# Altium PCB Boost_PCB.PcbDoc
Units mm, origin at the board's own origin, x right, y up, seen from the top; angles counter-clockwise.
Board outline 63.5 x 49.53 mm, 2 copper layers (Top Layer, Bottom Layer); 37 components, 20 nets, 129 pads, 149 vias.
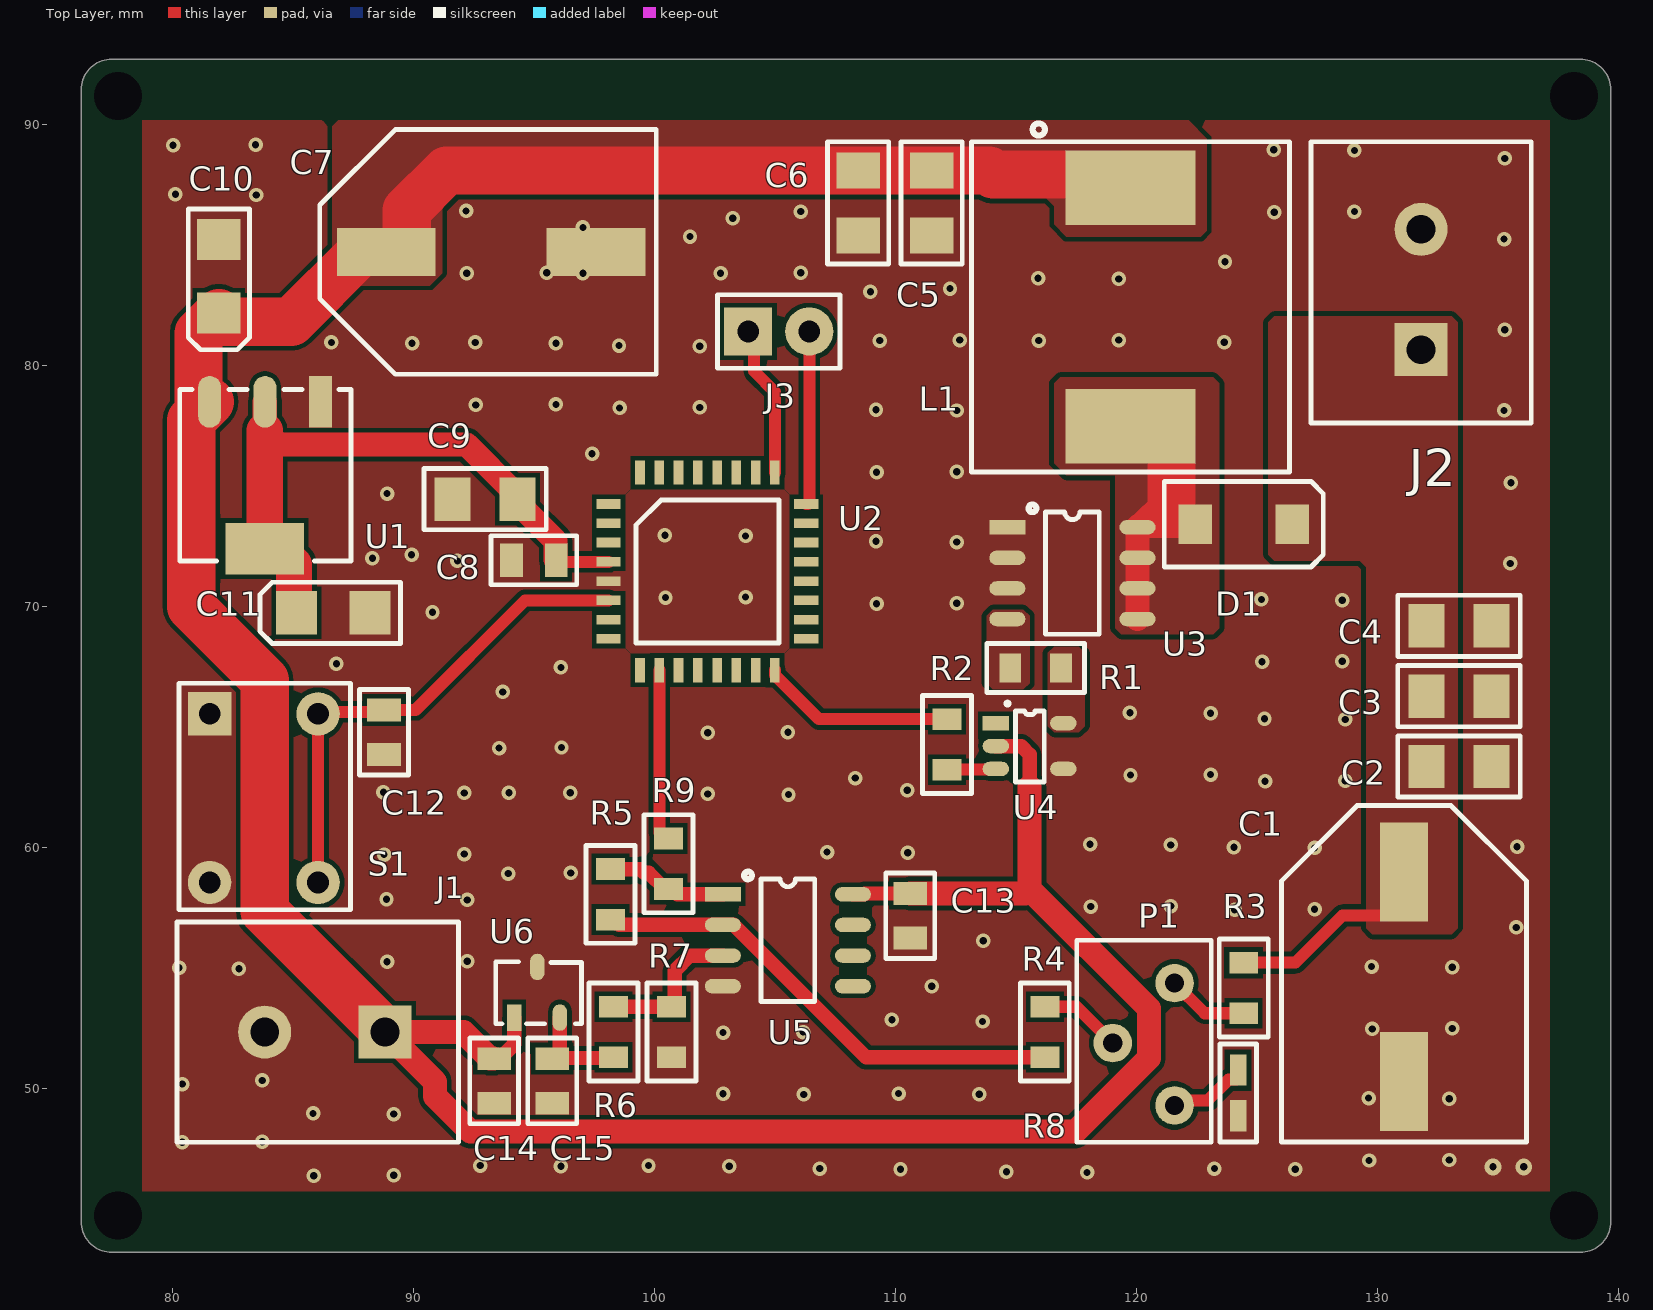
[diagram p0: Top Layer view]
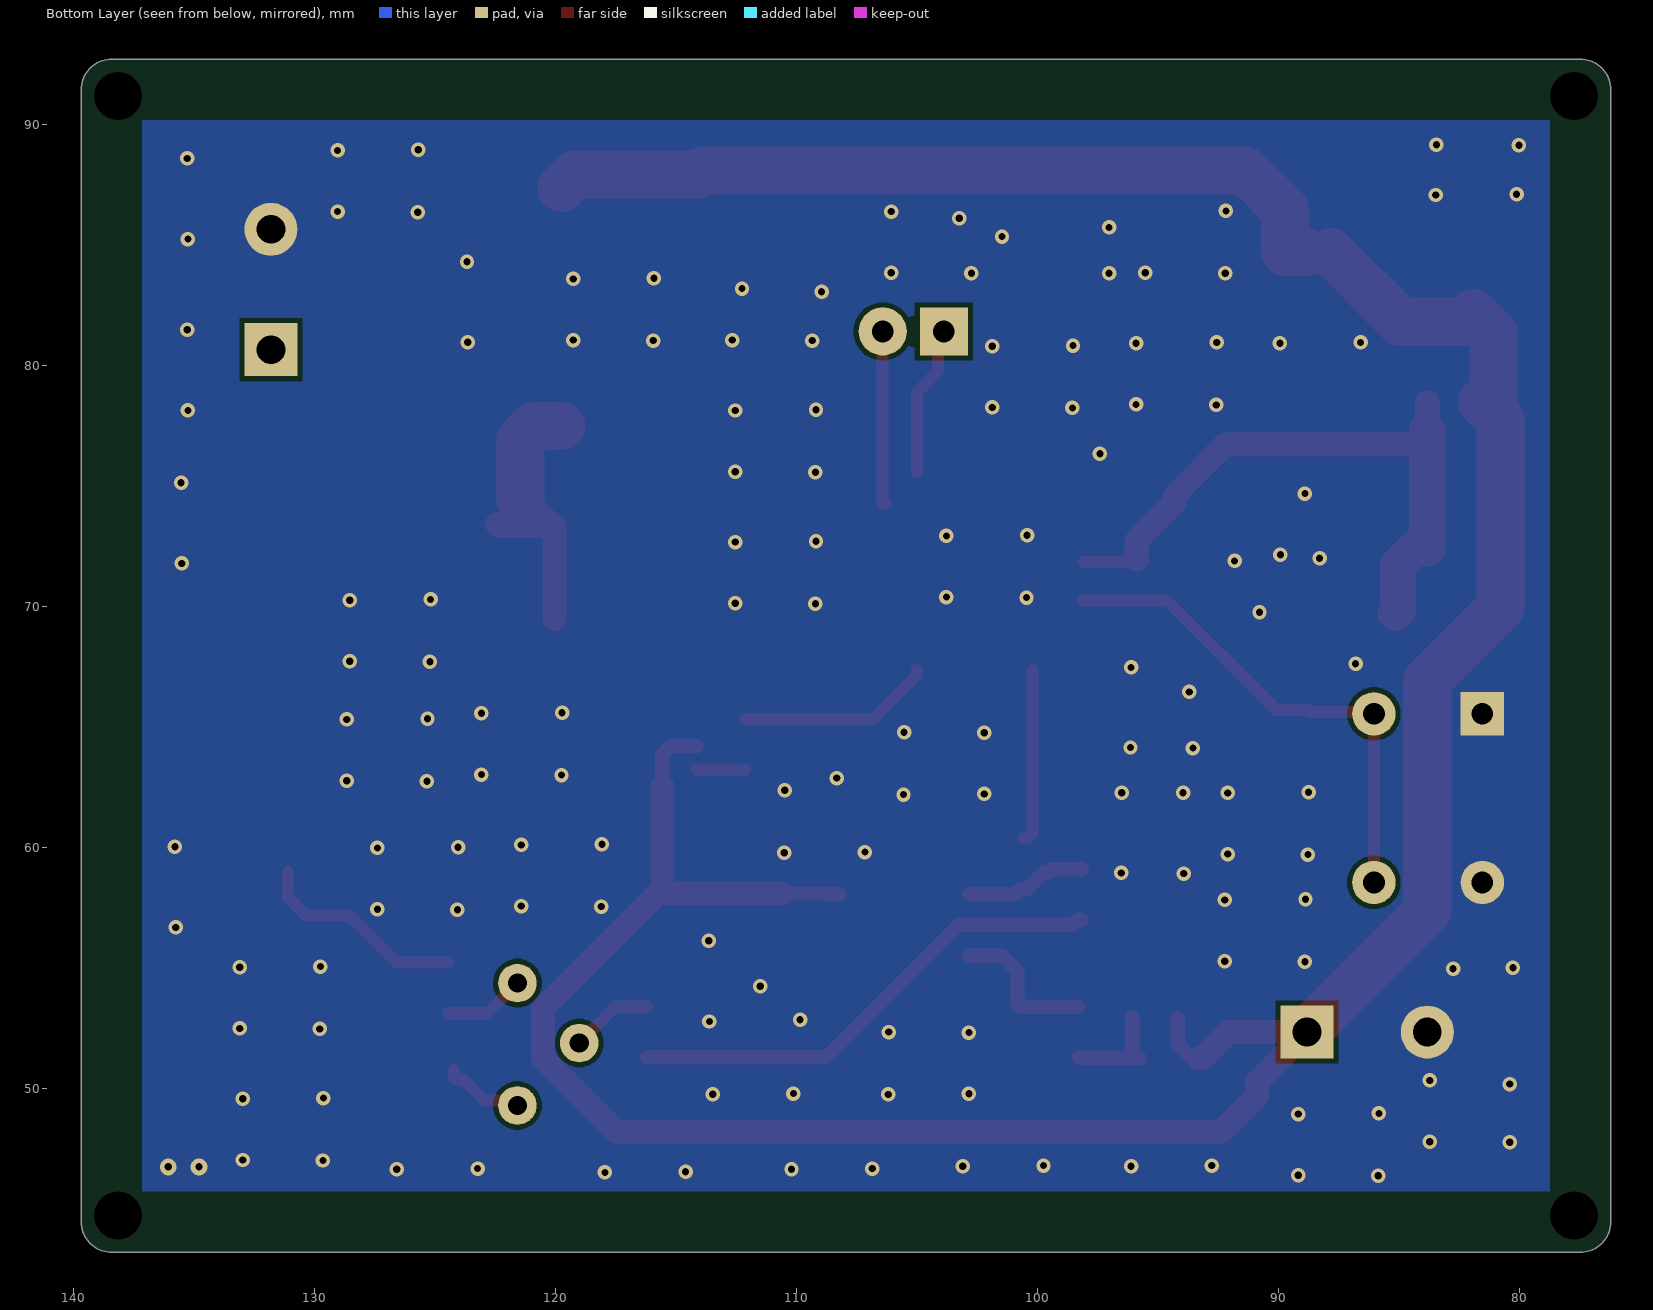
[diagram p1: Bottom Layer view, seen from below]
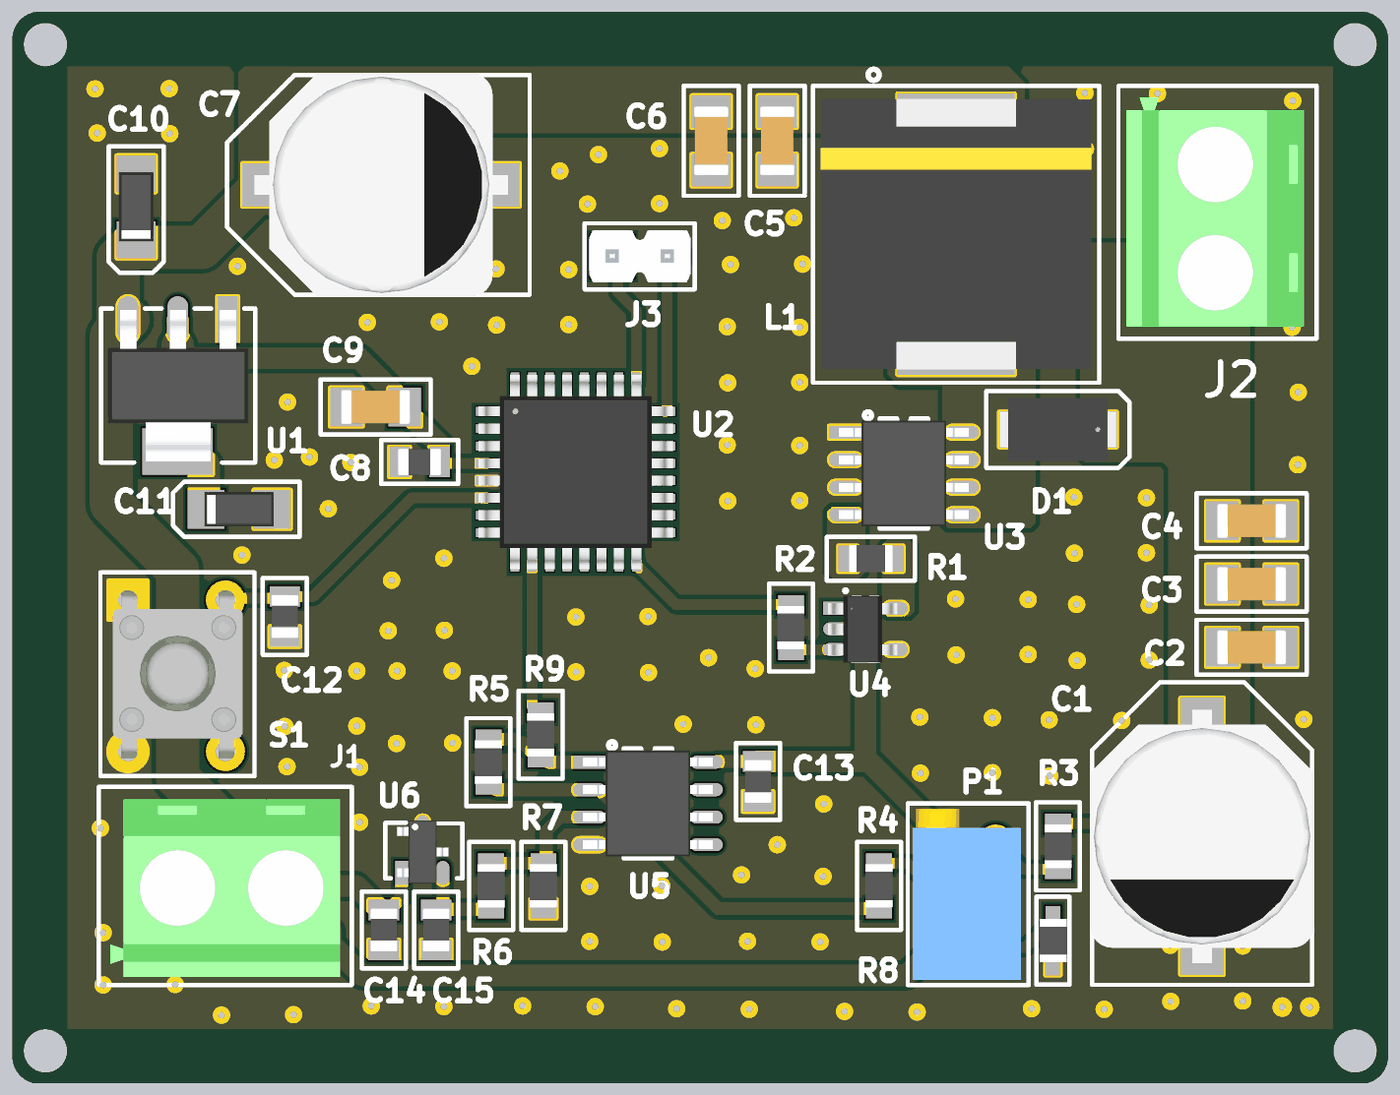
[diagram p2: 3D render of the assembled board from above, using the file's embedded part models]

## Layer stack, top to bottom
Top Solder: solder mask 0.0102, Solder Resist, Dk 3.5
Top Layer: signal copper 0.0356
Dielectric 1: dielectric 0.32, FR-4, Dk 4.8
Bottom Layer: signal copper 0.0356
Bottom Solder: solder mask 0.0102, Solder Resist, Dk 3.5

## Board outline
76.2,44.45 ccw(c77.47,44.45) 77.47,43.18 138.43,43.18 ccw(c138.43,44.45) 139.7,44.45 139.7,91.44 ccw(c138.43,91.44) 138.43,92.71 77.47,92.71 ccw(c77.47,91.44) 76.2,91.44

## Design rules (kind name [scope] priority, off if disabled: settings)
Clearance [All] p1: gap=0.2 ignorepadtopadclearanceinfootprint=FALSE
HoleSize [All] p1: absolutevalues=TRUE maxlimit=3.6 minlimit=0.025 maxpercent=80.000 minpercent=20.000
PlaneConnect [All] p1: planeconnectstyle=Direct reliefexpansion=0.508 reliefentries=4 reliefconductorwidth=0.254 reliefairgap=0.254
PolygonConnect [All] p1: connectstyle=Direct reliefconductorwidth=0.254 reliefentries=4 polygonreliefangle="90 Angle" airgapwidth=0.254
RoutingVias [All] p1: holewidth=0.3 width=0.6 viastyle="Through Hole" minholewidth=0.3 minwidth=0.6 maxholewidth=0.5 maxwidth=0.8
SilkToSolderMaskClearance [IsPad] p1: minsilkscreentomaskgap=0.1 clearancetoexposedcopper=TRUE
SolderMaskExpansion [All] p1: expansion=0.102 istentingtop=FALSE
SupplyNets "Schematic Supply Nets_2" [InNet('3V3')] p1: voltage=0.000
SupplyNets "Schematic Supply Nets_1" [InNet('GND')] p2: voltage=0.000
SupplyNets "Schematic Supply Nets" [InNet('+5')] p3: voltage=0.000
Width [All] p1: maxlimit=2 minlimit=0.3 preferedwidth=0.5 minimp=50.000000 maximp=50.000000 favimp=50.000000
27 further rules are at their usual default settings.

## Classes and differential pairs
component class Boost_Schem: C1 C2 C3 C4 C5 C6 C8 C9 C10 C11 C12 C13 C14 C15 D1 J3 L1 P1 R1 R2 R3 R4 R5 R6 R7 R8 R9 S1 U1 U2 U3 U4 U5 U6

## Components (designator, comment, footprint, x,y, rotation, side; value= is the part's Value field where it differs from the comment)
C1 "100u" CAP_100UF_ALUM 131.115,54.617 r90 top value=100µF
C2 "10u" "CAP_10UF_1206_CER - DUPLICATE" 133.401,63.348 r0 top value=10µF
C3 "10u" "CAP_10UF_1206_CER - DUPLICATE" 133.401,66.269 r0 top value=10µF
C4 "10u" "CAP_10UF_1206_CER - DUPLICATE" 133.401,69.19 r0 top value=10µF
C5 "10u" "CAP_10UF_1206_CER - DUPLICATE" 111.506,86.741 r270 top value=10µF
C6 "10u" "CAP_10UF_1206_CER - DUPLICATE" 108.458,86.741 r270 top value=10µF
C7 "100u" CAP_100UF_ALUM 93.218,84.709 r180 top value=100µF
C8 "100n" CAP_100N_0805_CER 94.996,71.907 r0 top
C9 "10u" "CAP_10UF_1206_CER - DUPLICATE" 92.964,74.447 r180 top value=10µF
C10 "10U" CAP_10U_1206_TANTAL 81.915,83.693 r270 top
C11 "10U" CAP_10U_1206_TANTAL 86.665,69.723 r180 top
C12 "100n" CAP_100N_0805_CER 88.773,64.77 r90 top
C13 "1U" CAP_1U_0805_CER 110.617,57.15 r90 top
C14 "100n" CAP_100N_0805_CER 93.345,50.292 r90 top
C15 "1U" CAP_1U_0805_CER 95.758,50.292 r90 top
D1 "SCHOTTKY_2A_60V" SCHOTKY 124.46,73.406 r0 top
J1 "LISTWA ZACISKOWA DO DRUKU" ZACISK 88.82,52.324 r180 top
J2 "LISTWA ZACISKOWA DO DRUKU" ZACISK 131.826,80.649 r90 top
J3 "ZŁĄCZE KOŁOWE" SWD 103.886,81.407 r90 top
L1 "33u" CEWKA 119.761,82.426 r270 top value=32.01µH
P1 "2K" POTENCJOMETR 119.05,54.356 r0 top
R1 "10" RES_10_0805 115.824,67.437 r180 top
R2 "10" RES_10_0805 112.141,64.262 r270 top
R3 "4.3K" RES_4K3_0805 124.46,54.153 r90 top value=4.3kΩ
R4 "100K" RES_100K_0805 116.205,52.324 r90 top
R5 "100K" RES_100K_0805 98.171,58.039 r270 top
R6 "100K" RES_100K_0805 98.298,52.324 r90 top
R7 "100K" RES_100K_0805 100.711,52.324 r90 top
R8 "51" REZ_51_OHM_0805 124.231,49.794 r90 top
R9 "RES_1K_0805" RES_1K_0805 100.584,59.309 r90 top
S1 "Tact Switch" SWITCH 81.534,65.532 r0 top
U1 "LM1117MPX-3.3" LDO 86.134,78.486 r270 top
U2 "STM32G030K8T6" QUAD32 102.199,71.444 r0 top
U3 "IRL6342TRPBF" TRANZYSTOR 117.348,71.374 r0 top
U4 "MCP1416T-E/OT" DRIVER 114.173,65.146 r0 top
U5 "MCP6022" WZMACNIACZ 105.537,56.134 r0 top
U6 "REF3033AIDBZR" REFF 95.123,53.975 r90 top

## Footprints (in the part's own frame and the unit in brackets; to place one, negate y for a bottom-side part, rotate by r counter-clockwise, add the part's x,y. Pads: shape width x height; smd on the part's side, far side on the other; paste and mask are expansions set on the pad)
CAP_1U_0805_CER [mm]
  rect 0.95x1.4 smd paste+0: 1(-0.925,0) 2(0.925,0)
  silkscreen extent -1.78,-1.02 1.78,1.02, body extent -1,-0.63 1,0.63, height 0.71
CAP_10U_1206_TANTAL [mm]
  rect 1.7x1.8 smd paste+0: 1(-1.525,0) 2(1.525,0)
  silkscreen extent -2.79,-1.27 3.05,1.27, body extent -1.6,-0.8 1.6,0.8, height 1.81
"CAP_10UF_1206_CER - DUPLICATE" [mm]
  rect 1.5x1.8 smd: 1(-1.35,0) 2(1.35,0)
  silkscreen extent -2.54,-1.27 2.54,1.27, body extent -1.6,-0.8 1.6,0.8, height 1.81
CAP_100N_0805_CER [mm]
  rect 0.95x1.4 smd paste+0: 1(-0.925,0) 2(0.925,0)
  silkscreen extent -1.78,-1.02 1.78,1.02, body extent -1,-0.63 1,0.63, height 0.71
CAP_100UF_ALUM [mm]
  rect 4.1x2 smd paste+0: 1(-4.35,0) 2(4.35,0)
  silkscreen extent -6.86,-5.08 7.11,5.08, body extent -5.85,-5.15 5.85,5.15, height 10.21
CEWKA [mm]
  rect 3.1x5.4 smd: 1(-4.95,0) 2(4.95,0)
  silkscreen extent -7.62,-6.6 6.86,6.6, body extent -6.25,-6.25 6.25,6.25, height 8
DRIVER [mm]
  rect 1.1x0.6 smd paste+0 mask+0.05: 1(0,0)
  oval 1.1x0.6 smd paste+0 mask+0.04: 2(0,-0.95)
  oval 1.1x0.6 smd paste+0 mask+0.05: 3(0,-1.9)
  oval 1.1x0.6 smd paste+0: 4(2.8,-1.9) 5(2.8,0)
  silkscreen extent 0.45,-2.44 2.01,0.85, body extent -0.33,-2.51 2.87,0.58, height 1.45
LDO [mm]
  rect 2.15x0.95 smd paste+0: 1(0,0)
  oval 2.15x0.95 smd paste+0: 2(0,-2.3) 3(0,-4.6)
  rect 2.15x3.25 smd paste+0: 4(6.096,-2.311)
  silkscreen extent -0.51,-5.84 6.6,1.27, body extent -0.45,-5.54 6.55,0.96, height 1.71
POTENCJOMETR [mm]
  round 1.6 hole 0.8: 1(2.54,0) 2(-0.025,-2.489) 3(2.54,-5.08)
  silkscreen extent -1.52,-6.6 4.06,1.78, body extent -1.3,-6.36 3.71,1.54, height 6.76
QUAD32 [mm]
  rect 1x0.4 smd paste+0 mask+0.07: 1(-4.1,2.8) 2(-4.1,2)
  rect 1x0.4 smd mask+0.07: 3(-4.1,1.2) 4(-4.1,0.4) 5(-4.1,-0.4) 6(-4.1,-1.2) 7(-4.1,-2) 8(-4.1,-2.8) 17(4.1,-2.8) 18(4.1,-2) 19(4.1,-1.2) 20(4.1,-0.4) 21(4.1,0.4) 22(4.1,1.2) 23(4.1,2) 24(4.1,2.8)
  rect 0.4x1 smd mask+0.07: 9(-2.8,-4.1) 10(-2,-4.1) 11(-1.2,-4.1) 12(-0.4,-4.1) 13(0.4,-4.1) 14(1.2,-4.1) 15(2,-4.1) 16(2.8,-4.1) 25(2.8,4.1) 26(2,4.1) 27(1.2,4.1) 28(0.4,4.1) 29(-0.4,4.1) 30(-1.2,4.1) 31(-2,4.1) 32(-2.8,4.1)
  silkscreen extent -2.97,-2.97 2.97,2.97, body extent -4.5,-4.5 4.5,4.5, height 1.6
REFF [mm]
  rect 1.1x0.6 smd paste+0: 1(-1.05,0.95)
  oval 1.1x0.6 smd paste+0: 2(-1.05,-0.95)
  oval 1.1x0.6 smd: 3(1.05,-0.015)
  silkscreen extent -1.3,-1.84 1.27,1.71, body extent -1.27,-1.48 1.1,1.44, height 1.03
RES_1K_0805 [mm]
  rect 0.9x1.2 smd paste+0 mask+0.102: 1(-1.05,0) 2(1.05,0)
  silkscreen extent -2.03,-1.02 2.03,1.02, body extent -1,-0.63 1,0.63, height 0.61
RES_4K3_0805 [mm]
  rect 0.9x1.2 smd paste+0 mask+0.102: 1(-1.05,0) 2(1.05,0)
  silkscreen extent -2.03,-1.02 2.03,1.02, body extent -1,-0.63 1,0.63, height 0.61
RES_10_0805 [mm]
  rect 0.9x1.2 smd paste+0 mask+0.102: 1(-1.05,0) 2(1.05,0)
  silkscreen extent -2.03,-1.02 2.03,1.02, body extent -1,-0.63 1,0.63, height 0.61
RES_100K_0805 [mm]
  rect 0.9x1.2 smd paste+0 mask+0.102: 1(-1.05,0) 2(1.05,0)
  silkscreen extent -2.03,-1.02 2.03,1.02, body extent -1,-0.63 1,0.63, height 0.61
REZ_51_OHM_0805 [mm]
  rect 1.3x0.7 smd: 1(-0.95,0) 2(0.95,0)
  silkscreen extent -2.03,-0.76 2.03,0.76, body extent -1,-0.63 1,0.63, height 0.61
SCHOTKY [mm]
  rect 1.4x1.64 smd paste+0 mask+0.102: 1(-2.015,0) 2(2.015,0)
  silkscreen extent -3.3,-1.78 3.3,1.78, body extent -2.68,-1.45 2.68,1.45, height 2.64
SWD [mm]
  rect 2x2 hole 0.9: 1(0,0)
  round 2 hole 0.9: 2(0,-2.54)
  silkscreen extent -1.52,-3.81 1.52,1.27, body extent -1.19,-3.61 1.22,1.07, height 8.19
SWITCH [mm]
  round 1.8 hole 0.9: 1(0,-7) 2(4.5,-7) 2(4.5,0)
  rect 1.8x1.8 hole 0.9: 1(0,0)
  silkscreen extent -1.27,-8.13 5.84,1.27, body extent -0.69,-7.3 5.3,0.5, height 13.01
TRANZYSTOR [mm]
  rect 1.5x0.6 smd paste+0: 1(-2.7,1.905)
  oval 1.5x0.6 smd paste+0: 2(-2.7,0.635) 3(-2.7,-0.635) 4(-2.7,-1.905) 5(2.7,-1.905) 6(2.7,-0.635) 7(2.7,0.635) 8(2.7,1.905)
  silkscreen extent -1.82,-2.54 1.12,2.85, body extent -3,-2.45 3,2.45, height 1.75
WZMACNIACZ [mm]
  rect 1.5x0.6 smd paste+0: 1(-2.7,1.905)
  oval 1.5x0.6 smd paste+0: 2(-2.7,0.635) 3(-2.7,-0.635) 4(-2.7,-1.905) 5(2.7,-1.905) 6(2.7,-0.635) 7(2.7,0.635) 8(2.7,1.905)
  silkscreen extent -1.82,-2.54 1.12,2.85, body extent -3,-2.45 3,2.45, height 1.75
ZACISK [mm]
  rect 2.2x2.2 hole 1.2: 1(0,0)
  round 2.2 hole 1.2: 2(5,0)
  silkscreen extent -3.05,-4.57 8.64,4.57, body extent -2.5,-4 8.1,4.2, height 10.01

## Part data
C1 C7: library part CAP_100UF_63V_ALUM, "SMD Aluminum Electrolytic Capacitor SMD, D10xL10.2mm 100μF ±20% 63V 2000Hrs@105℃ 400mA 350mΩ", Case/Package=Radial, Dielectric Material=Aluminium, ESR (Equivalent Series Resistance)=350mΩ, Leakage Current=63µA, Manufacturer=Panasonic, Manufacturer Lifecycle Status=ACTIVE, Manufacturer Part Number=EEEFK1J101P, Max Operating Temperature=105°C, Min Operating Temperature=-55°C, Ripple Current=400mA, Supplier Part Number=7083623P, Tolerance=20%, Voltage=63V, Category="Aluminum Electrolytic Capacitors", ComponentLink1Description=https://datasheet.octopart.com:443/EEEFK1J101P-Panasonic-datasheet-62287436.pdf?src-supplier=Farnell, ComponentLink1URL=https://datasheet.octopart.com:443/EEEFK1J101P-Panasonic-datasheet-62287436.pdf?src-supplier=Farnell, ComponentLink2Description=https://datasheet.octopart.com:443/EEEFK1J101P-Panasonic-datasheet-5318435.pdf?src-supplier=Farnell, ComponentLink2URL=https://datasheet.octopart.com:443/EEEFK1J101P-Panasonic-datasheet-5318435.pdf?src-supplier=Farnell, ComponentLink3Description=https://datasheet.octopart.com:443/EEEFK1J101P-Panasonic-datasheet-5316599.pdf?src-supplier=Farnell, ComponentLink3URL=https://datasheet.octopart.com:443/EEEFK1J101P-Panasonic-datasheet-5316599.pdf?src-supplier=Farnell, ComponentLink4Description=https://datasheet.octopart.com:443/EEEFK1J101P-Panasonic-datasheet-5390910.pdf?src-supplier=Farnell, ComponentLink4URL=https://datasheet.octopart.com:443/EEEFK1J101P-Panasonic-datasheet-5390910.pdf?src-supplier=Farnell, ComponentLink5Description=https://datasheet.octopart.com:443/EEEFK1J101P-Panasonic-datasheet-7550061.pdf?src-supplier=Farnell, ComponentLink5URL=https://datasheet.octopart.com:443/EEEFK1J101P-Panasonic-datasheet-7550061.pdf?src-supplier=Farnell, ComponentLink6Description=https://datasheet.octopart.com:443/EEEFK1J101P-Panasonic-datasheet-1770.pdf?src-supplier=Farnell, ComponentLink6URL=https://datasheet.octopart.com:443/EEEFK1J101P-Panasonic-datasheet-1770.pdf?src-supplier=Farnell, ComponentLink7Description=https://datasheet.octopart.com:443/EEEFK1J101P-Panasonic-datasheet-1290.pdf?src-supplier=Farnell, ComponentLink7URL=https://datasheet.octopart.com:443/EEEFK1J101P-Panasonic-datasheet-1290.pdf?src-supplier=Farnell, ComponentLink8Description=https://datasheet.octopart.com:443/EEEFK1J101P-Panasonic-datasheet-2601.pdf?src-supplier=Farnell, ComponentLink8URL=https://datasheet.octopart.com:443/EEEFK1J101P-Panasonic-datasheet-2601.pdf?src-supplier=Farnell, ComponentLink9Description=https://datasheet.octopart.com:443/EEEFK1J101P-Panasonic-datasheet-122249.pdf?src-supplier=Farnell, ComponentLink9URL=https://datasheet.octopart.com:443/EEEFK1J101P-Panasonic-datasheet-122249.pdf?src-supplier=Farnell, ComponentLink10Description=https://datasheet.octopart.com:443/EEEFK1J101P-Panasonic-datasheet-4056.pdf?src-supplier=Farnell, ComponentLink10URL=https://datasheet.octopart.com:443/EEEFK1J101P-Panasonic-datasheet-4056.pdf?src-supplier=Farnell, ComponentLink11Description=https://datasheet.octopart.com:443/EEEFK1J101P-Panasonic-datasheet-169278531.pdf?src-supplier=IHS, ComponentLink11URL=https://datasheet.octopart.com:443/EEEFK1J101P-Panasonic-datasheet-169278531.pdf?src-supplier=IHS, ComponentLink12Description=https://datasheet.octopart.com:443/EEEFK1J101P-Panasonic-datasheet-8161.pdf?src-supplier=Newark, ComponentLink12URL=https://datasheet.octopart.com:443/EEEFK1J101P-Panasonic-datasheet-8161.pdf?src-supplier=Newark, ComponentLink13Description=https://datasheet.octopart.com:443/EEEFK1J101P-Panasonic-datasheet-61627622.pdf?src-supplier=Newark, ComponentLink13URL=https://datasheet.octopart.com:443/EEEFK1J101P-Panasonic-datasheet-61627622.pdf?src-supplier=Newark, ComponentLink14Description=https://datasheet.octopart.com:443/EEEFK1J101P-Panasonic-datasheet-8852369.pdf?src-supplier=Newark, ComponentLink14URL=https://datasheet.octopart.com:443/EEEFK1J101P-Panasonic-datasheet-8852369.pdf?src-supplier=Newark, ComponentLink15Description=https://datasheet.octopart.com:443/EEEFK1J101P-Panasonic-datasheet-8712906.pdf?src-supplier=Newark, ComponentLink15URL=https://datasheet.octopart.com:443/EEEFK1J101P-Panasonic-datasheet-8712906.pdf?src-supplier=Newark, ComponentLink16Description=https://datasheet.octopart.com:443/EEEFK1J101P-Panasonic-datasheet-13278598.pdf?src-supplier=Newark, ComponentLink16URL=https://datasheet.octopart.com:443/EEEFK1J101P-Panasonic-datasheet-13278598.pdf?src-supplier=Newark, ComponentLink17Description=https://datasheet.octopart.com:443/EEE-FK1J101P-Panasonic-datasheet-22087609.pdf?src-supplier=Newark, ComponentLink17URL=https://datasheet.octopart.com:443/EEE-FK1J101P-Panasonic-datasheet-22087609.pdf?src-supplier=Newark, ComponentLink18Description=https://datasheet.octopart.com:443/EEEFK1J101P-Panasonic-datasheet-11546739.pdf?src-supplier=Electro+Sonic, ComponentLink18URL=https://datasheet.octopart.com:443/EEEFK1J101P-Panasonic-datasheet-11546739.pdf?src-supplier=Electro+Sonic, ComponentLink19Description=https://datasheet.octopart.com:443/EEEFK1J101P-Panasonic-datasheet-13266987.pdf?src-supplier=RS+(Formerly+Allied+Electronics), ComponentLink19URL=https://datasheet.octopart.com:443/EEEFK1J101P-Panasonic-datasheet-13266987.pdf?src-supplier=RS+(Formerly+Allied+Electronics), ComponentLink20Description=https://datasheet.octopart.com:443/EEE-FK1J101P-Panasonic-datasheet-150469824.pdf?src-supplier=Master+Electronics, ComponentLink20URL=https://datasheet.octopart.com:443/EEE-FK1J101P-Panasonic-datasheet-150469824.pdf?src-supplier=Master+Electronics, ComponentLink21Description=https://datasheet.octopart.com:443/EEEFK1J101P-Panasonic-datasheet-8854493.pdf?src-supplier=Future+Electronics, ComponentLink21URL=https://datasheet.octopart.com:443/EEEFK1J101P-Panasonic-datasheet-8854493.pdf?src-supplier=Future+Electronics, ComponentLink22Description=https://datasheet.octopart.com:443/EEEFK1J101P-Panasonic-datasheet-8711795.pdf?src-supplier=Future+Electronics, ComponentLink22URL=https://datasheet.octopart.com:443/EEEFK1J101P-Panasonic-datasheet-8711795.pdf?src-supplier=Future+Electronics, ComponentLink23Description=https://datasheet.octopart.com:443/EEEFK1J101P-Panasonic-datasheet-5313801.pdf?src-supplier=Future+Electronics, ComponentLink23URL=https://datasheet.octopart.com:443/EEEFK1J101P-Panasonic-datasheet-5313801.pdf?src-supplier=Future+Electronics, ComponentLink24Description=https://datasheet.octopart.com:443/EEEFK1J101P-Panasonic-datasheet-7555708.pdf?src-supplier=Jameco, ComponentLink24URL=https://datasheet.octopart.com:443/EEEFK1J101P-Panasonic-datasheet-7555708.pdf?src-supplier=Jameco, ComponentLink25Description=https://sigma.octopart.com:443/150570760/technical_drawing/Panasonic-EEEFK1J101P.pdf?src-supplier=Panasonic+SCT, ComponentLink25URL=https://sigma.octopart.com:443/150570760/technical_drawing/Panasonic-EEEFK1J101P.pdf?src-supplier=Panasonic+SCT, ComponentLink26Description=https://datasheet.octopart.com:443/EEEFK1J101P-Panasonic-datasheet-136531309.pdf?src-supplier=TME, ComponentLink26URL=https://datasheet.octopart.com:443/EEEFK1J101P-Panasonic-datasheet-136531309.pdf?src-supplier=TME, Contact Plating=Tin, Country of Origin="Japan, Malaysia", Diameter=10mm, Dissipation Factor=8%, Export Control Classification Number (ECCN) Code=EAR99, Harmonized Tariff Schedule (HTS) Code=8532.22.00.20, Height=10.2mm, Height - Seated (Max)=10.4902mm, Impedance=350mΩ, Introduction Date=2004-08-25, Lead Free="Lead Free", Length=10.2mm, Life (Hours)=2000hours, Lifecycle Status=Production, Material=Aluminium, Mounting Technology="Surface Mount", Number of Terminals=2, Packaging="Cut Tape", Part Series=FK, Pins=2, Polarity=Polar, Radiation Hardening=No, REACH SVHC=Yes, Ripple Current (AC)=400mA, RoHS=Compliant, Schedule B="8532220020, 8532220020|8532220020|8532220020|8532220020|8532220020|8532220020|8532220020|8532220020|8532220020|8532220020|8532220020|8532220020|8532220020|8532220020|8532220020|8532220020|8532220020|8532220020|8532220020|8532220020|8532220020|8532220020|8532220020|85", Stock=1435, Supplier=RS, Termination=SMD/SMT, Voltage Rating=63V, Voltage Rating (AC)=63V, Voltage Rating (DC)=63V, Width=10.3mm
C2 C3 C4 C6 C9: library part CAP_10uF_1206_CER, "CAP CER 10UF 50V X7R 1206", Case Code (Imperial)=1206, Case Code (Metric)=3216, Dielectric=X7R, Dielectric Material=Ceramic, Manufacturer="Samsung Electro-Mechanics", Manufacturer Part Number=CL31B106KBHNNNE, Max Operating Temperature=125°C, Min Operating Temperature=-55°C, Tolerance=10%, Voltage Rating=50V, Case/Package=1206, Category="Ceramic Capacitors", China RoHS=Compliant, ComponentLink1Description=https://datasheet.octopart.com:443/CL31B106KBHNNNE-Samsung-Electro-Mechanics-datasheet-137256395.pdf?src-supplier=Upverter, ComponentLink1URL=https://datasheet.octopart.com:443/CL31B106KBHNNNE-Samsung-Electro-Mechanics-datasheet-137256395.pdf?src-supplier=Upverter, ComponentLink2Description=https://datasheet.octopart.com:443/CL31B106KBHNNNE-Samsung-Electro-Mechanics-datasheet-149066874.pdf?src-supplier=Future+Electronics, ComponentLink2URL=https://datasheet.octopart.com:443/CL31B106KBHNNNE-Samsung-Electro-Mechanics-datasheet-149066874.pdf?src-supplier=Future+Electronics, ComponentLink3Description=https://datasheet.octopart.com:443/CL31B106KBHNNNE-Samsung-Electro-Mechanics-datasheet-67374631.pdf?src-supplier=Future+Electronics, ComponentLink3URL=https://datasheet.octopart.com:443/CL31B106KBHNNNE-Samsung-Electro-Mechanics-datasheet-67374631.pdf?src-supplier=Future+Electronics, ComponentLink4Description=https://datasheet.octopart.com:443/CL31B106KBHNNNE-Samsung-Electro-Mechanics-datasheet-136482622.pdf?src-supplier=Newark, ComponentLink4URL=https://datasheet.octopart.com:443/CL31B106KBHNNNE-Samsung-Electro-Mechanics-datasheet-136482622.pdf?src-supplier=Newark, ComponentLink5Description=https://datasheet.octopart.com/CL31B106KBHNNNE-Samsung-Electro-Mechanics-datasheet-97040617.pdf, ComponentLink5URL=https://datasheet.octopart.com/CL31B106KBHNNNE-Samsung-Electro-Mechanics-datasheet-97040617.pdf, ComponentLink6Description=https://datasheet.octopart.com/CL31B106KBHNNNE-Samsung-Electro-Mechanics-datasheet-8324245.pdf, ComponentLink6URL=https://datasheet.octopart.com/CL31B106KBHNNNE-Samsung-Electro-Mechanics-datasheet-8324245.pdf, ComponentLink7Description=https://datasheet.octopart.com:443/CL31B106KBHNNNE-Samsung-Electro-Mechanics-datasheet-110617700.pdf?src-supplier=LCSC, ComponentLink7URL=https://datasheet.octopart.com:443/CL31B106KBHNNNE-Samsung-Electro-Mechanics-datasheet-110617700.pdf?src-supplier=LCSC, ComponentLink8Description=https://datasheet.octopart.com:443/CL31B106KBHNNNE-Samsung-datasheet-59220082.pdf?src-supplier=TME, ComponentLink8URL=https://datasheet.octopart.com:443/CL31B106KBHNNNE-Samsung-datasheet-59220082.pdf?src-supplier=TME, Country of Origin="Mainland China, Philippines, South Korea", Export Control Classification Number (ECCN) Code=EAR99, Harmonized Tariff Schedule (HTS) Code=8532.24.00.20, Height=1.8mm, Introduction Date=2014-09-18, Lead Free="Lead Free", Length=3.2mm, Lifecycle Status=Production, Material=Ceramic, Mounting Technology="Surface Mount", Number of Terminals=2, Packaging="Tape & Reel (TR)", Pricing="2000=0,04677, 4000=0,04637, 8000=0,04557, 16000=0,04478, 32000=0,04398 (USD)", REACH SVHC=Yes, RoHS=Compliant, Schedule B="8532240020, 8532240020|8532240020|8532240020|8532240020|8532240020", Stock=874000, Supplier=Avnet, Supplier Part Number=CL31B106KBHNNNE, Thickness=1.8034mm, Voltage Rating (DC)=50V, Width=1.6mm
C5: library part CAP_10uF_1206_CER, "CAP_10uF_1206_CER", Case Code (Imperial)=1206, Case Code (Metric)=3216, Dielectric=X7R, Dielectric Material=Ceramic, Manufacturer="Samsung Electro-Mechanics", Manufacturer Part Number=CL31B106KBHNNNE, Max Operating Temperature=125°C, Min Operating Temperature=-55°C, Tolerance=10%, Voltage Rating=50V, Case/Package=1206, Category="Ceramic Capacitors", China RoHS=Compliant, ComponentLink1Description=https://datasheet.octopart.com:443/CL31B106KBHNNNE-Samsung-Electro-Mechanics-datasheet-137256395.pdf?src-supplier=Upverter, ComponentLink1URL=https://datasheet.octopart.com:443/CL31B106KBHNNNE-Samsung-Electro-Mechanics-datasheet-137256395.pdf?src-supplier=Upverter, ComponentLink2Description=https://datasheet.octopart.com:443/CL31B106KBHNNNE-Samsung-Electro-Mechanics-datasheet-149066874.pdf?src-supplier=Future+Electronics, ComponentLink2URL=https://datasheet.octopart.com:443/CL31B106KBHNNNE-Samsung-Electro-Mechanics-datasheet-149066874.pdf?src-supplier=Future+Electronics, ComponentLink3Description=https://datasheet.octopart.com:443/CL31B106KBHNNNE-Samsung-Electro-Mechanics-datasheet-67374631.pdf?src-supplier=Future+Electronics, ComponentLink3URL=https://datasheet.octopart.com:443/CL31B106KBHNNNE-Samsung-Electro-Mechanics-datasheet-67374631.pdf?src-supplier=Future+Electronics, ComponentLink4Description=https://datasheet.octopart.com:443/CL31B106KBHNNNE-Samsung-Electro-Mechanics-datasheet-136482622.pdf?src-supplier=Newark, ComponentLink4URL=https://datasheet.octopart.com:443/CL31B106KBHNNNE-Samsung-Electro-Mechanics-datasheet-136482622.pdf?src-supplier=Newark, ComponentLink5Description=https://datasheet.octopart.com/CL31B106KBHNNNE-Samsung-Electro-Mechanics-datasheet-97040617.pdf, ComponentLink5URL=https://datasheet.octopart.com/CL31B106KBHNNNE-Samsung-Electro-Mechanics-datasheet-97040617.pdf, ComponentLink6Description=https://datasheet.octopart.com/CL31B106KBHNNNE-Samsung-Electro-Mechanics-datasheet-8324245.pdf, ComponentLink6URL=https://datasheet.octopart.com/CL31B106KBHNNNE-Samsung-Electro-Mechanics-datasheet-8324245.pdf, ComponentLink7Description=https://datasheet.octopart.com:443/CL31B106KBHNNNE-Samsung-Electro-Mechanics-datasheet-110617700.pdf?src-supplier=LCSC, ComponentLink7URL=https://datasheet.octopart.com:443/CL31B106KBHNNNE-Samsung-Electro-Mechanics-datasheet-110617700.pdf?src-supplier=LCSC, ComponentLink8Description=https://datasheet.octopart.com:443/CL31B106KBHNNNE-Samsung-datasheet-59220082.pdf?src-supplier=TME, ComponentLink8URL=https://datasheet.octopart.com:443/CL31B106KBHNNNE-Samsung-datasheet-59220082.pdf?src-supplier=TME, Country of Origin="Mainland China, Philippines, South Korea", Export Control Classification Number (ECCN) Code=EAR99, Harmonized Tariff Schedule (HTS) Code=8532.24.00.20, Height=1.8mm, Introduction Date=2014-09-18, Lead Free="Lead Free", Length=3.2mm, Lifecycle Status=Production, Material=Ceramic, Mounting Technology="Surface Mount", Number of Terminals=2, Packaging="Tape & Reel (TR)", Pricing="2000=0,04677, 4000=0,04637, 8000=0,04557, 16000=0,04478, 32000=0,04398 (USD)", REACH SVHC=Yes, RoHS=Compliant, Schedule B="8532240020, 8532240020|8532240020|8532240020|8532240020|8532240020", Stock=874000, Supplier=Avnet, Supplier Part Number=CL31B106KBHNNNE, Thickness=1.8034mm, Voltage Rating (DC)=50V, Width=1.6mm
C8 C12 C14: library part CAP_100nF_0805_CER
C10 C11: library part CAP_10uF_0805_TANTALUM
C13 C15: library part CAP_1uF_0805_CER
D1: "Dioda: prostownicza Schottky; SMA; SMD; 60V; 2A; rolka,taśma", Average Rectified Current=2A, Case/Package=SMA, Forward Voltage=550mV, Manufacturer=STMicroelectronics, Manufacturer Part Number=STPS2L60A, Max Forward Surge Current (Ifsm)=75A, Max Junction Temperature (Tj)=150°C, Max Repetitive Reverse Voltage (Vrrm)=60V, Max Reverse Leakage Current=100µA, Min Operating Temperature=-65°C, Supplier Part Number=249218P, Category="Schottky Diodes", China RoHS=Non-Compliant, ComponentLink1Description=https://datasheet.octopart.com:443/STPS2L60A-STMicroelectronics-datasheet-10540977.pdf?src-supplier=element14+APAC, ComponentLink1URL=https://datasheet.octopart.com:443/STPS2L60A-STMicroelectronics-datasheet-10540977.pdf?src-supplier=element14+APAC, ComponentLink2Description=https://datasheet.octopart.com:443/STPS2L60A-STMicroelectronics-datasheet-62337125.pdf?src-supplier=Newark, ComponentLink2URL=https://datasheet.octopart.com:443/STPS2L60A-STMicroelectronics-datasheet-62337125.pdf?src-supplier=Newark, ComponentLink3Description=https://datasheet.octopart.com:443/STPS2L60A-STMicroelectronics-datasheet-633754.pdf?src-supplier=element14, ComponentLink3URL=https://datasheet.octopart.com:443/STPS2L60A-STMicroelectronics-datasheet-633754.pdf?src-supplier=element14, ComponentLink4Description=https://datasheet.octopart.com:443/STPS2L60A-STMicroelectronics-datasheet-8474236.pdf?src-supplier=Farnell, ComponentLink4URL=https://datasheet.octopart.com:443/STPS2L60A-STMicroelectronics-datasheet-8474236.pdf?src-supplier=Farnell, ComponentLink5Description=https://datasheet.octopart.com:443/STPS2L60A-STMicroelectronics-datasheet-7700.pdf?src-supplier=DigiKey, ComponentLink5URL=https://datasheet.octopart.com:443/STPS2L60A-STMicroelectronics-datasheet-7700.pdf?src-supplier=DigiKey, ComponentLink6Description=https://datasheet.octopart.com:443/STPS2L60A-STMicroelectronics-datasheet-136784893.pdf?src-supplier=TME, ComponentLink6URL=https://datasheet.octopart.com:443/STPS2L60A-STMicroelectronics-datasheet-136784893.pdf?src-supplier=TME, ComponentLink7Description=https://datasheet.octopart.com:443/STPS2L60A-STMicroelectronics-datasheet-107242832.pdf?src-supplier=TME, ComponentLink7URL=https://datasheet.octopart.com:443/STPS2L60A-STMicroelectronics-datasheet-107242832.pdf?src-supplier=TME, ComponentLink8Description=https://datasheet.octopart.com:443/STPS2L60A-STMicroelectronics-datasheet-14054748.pdf?src-supplier=iiiC, ComponentLink8URL=https://datasheet.octopart.com:443/STPS2L60A-STMicroelectronics-datasheet-14054748.pdf?src-supplier=iiiC, ComponentLink9Description=https://datasheet.octopart.com:443/STPS2L60A-STMicroelectronics-datasheet-9806417.pdf?src-supplier=RS+(Formerly+Allied+Electronics), ComponentLink9URL=https://datasheet.octopart.com:443/STPS2L60A-STMicroelectronics-datasheet-9806417.pdf?src-supplier=RS+(Formerly+Allied+Electronics), Contact Plating=Tin, Current Rating=2A, Element Configuration=Single, Forward Current=2A, Height=2.65mm, Lead Free="Lead Free", Length=4.6mm, Lifecycle Status=Production, Max Operating Temperature=150°C, Max Output current=2A, Max Reverse Voltage (DC)=60V, Max Surge Current=75A, Mounting Technology="Surface Mount", Number of Elements=1, Number of Terminals=2, Output Current=2A, Packaging="Tape and Reel", Peak Non-Repetitive Surge Current=75A, Peak Reverse Current=100µA, Pins=2, Polarity=Standard, Radiation Hardening=No, REACH SVHC=No, Reverse Standoff Voltage=60V, RoHS=Compliant, Schedule B="8541100080, 8541100080|8541100080|8541100080|8541100080|8541100080, 8541100080|8541100080|8541100080|8541100080|8541100080|8541100080, 8541100080|8541100080|8541100080|8541100080|8541100080|8541100080|8541100080|8541100080|8541100080|8541100080|8541100080|8541100080|8541100080|8541100080|8541100080|8541100080|8541100080|8541100080|8541100080|8541100080|8541100080|8541100080|8541100080|85", Stock=4660, Supplier=RS, Voltage Rating (DC)=60V, Weight=4.535924g, Width=2.95mm
J1 J2: library part ZACISK
J3: "Złącze: kołkowe; listwa kołkowa; męskie; PIN: 2; THT; BERGSTIK; 1x2"
L1: library part IND_33uH_3.22A, "Dławik: drutowy; SMD; 32,01uH; Ipracy: 3,22A; R: 60mΩ; ±20%", Case/Package=Nonstandard, Current Rating=3.22A, DC Resistance (DCR)=60mΩ, Inductance Tolerance=20%, Manufacturer=Eaton, Manufacturer Part Number=DRA127-330-R, Max Operating Temperature=165°C, Min Operating Temperature=-40°C, Ratings=AEC-Q200, Saturation Current=6.22A, Self Resonant Frequency=100kHz, Supplier Part Number=283-3593-1-ND, Category="Fixed Inductors", ComponentLink1Description=https://datasheet.octopart.com:443/DRA127-330-R-Eaton-datasheet-137317803.pdf?src-supplier=Master+Electronics, ComponentLink1URL=https://datasheet.octopart.com:443/DRA127-330-R-Eaton-datasheet-137317803.pdf?src-supplier=Master+Electronics, ComponentLink2Description=https://datasheet.octopart.com:443/DRA127-330-R-Eaton-datasheet-613698.pdf?src-supplier=Master+Electronics, ComponentLink2URL=https://datasheet.octopart.com:443/DRA127-330-R-Eaton-datasheet-613698.pdf?src-supplier=Master+Electronics, ComponentLink3Description=https://datasheet.octopart.com:443/DRA127-330-R-Eaton-datasheet-62296927.pdf?src-supplier=Master+Electronics, ComponentLink3URL=https://datasheet.octopart.com:443/DRA127-330-R-Eaton-datasheet-62296927.pdf?src-supplier=Master+Electronics, ComponentLink4Description=https://datasheet.octopart.com:443/DRA127-330-R-Eaton-datasheet-137317933.pdf?src-supplier=Master+Electronics, ComponentLink4URL=https://datasheet.octopart.com:443/DRA127-330-R-Eaton-datasheet-137317933.pdf?src-supplier=Master+Electronics, ComponentLink5Description=https://datasheet.octopart.com:443/DRA127-330-R-Cooper-Industries-datasheet-12525441.pdf?src-supplier=Sager+Electronics, ComponentLink5URL=https://datasheet.octopart.com:443/DRA127-330-R-Cooper-Industries-datasheet-12525441.pdf?src-supplier=Sager+Electronics, ComponentLink6Description=https://datasheet.octopart.com:443/DRA127-330-R-Cooper-Bussmann-datasheet-180236337.pdf?src-supplier=IHS, ComponentLink6URL=https://datasheet.octopart.com:443/DRA127-330-R-Cooper-Bussmann-datasheet-180236337.pdf?src-supplier=IHS, Composition=Wirewound, Core Material=Ferrite, Country of Origin=Philippines, Depth=12.5mm, Export Control Classification Number (ECCN) Code=EAR99, Harmonized Tariff Schedule (HTS) Code=8504.50.80.00, Height=8mm, Height - Seated (Max)=8.001mm, Introduction Date=2006-11-16, Lead Free="Lead Free", Lead Pitch=7.5mm, Length=12.5mm, Lifecycle Status=Production, Max Current Rating=3.22A, Max DC Current=3.22A, Military Standard=Not, Mounting Technology="Surface Mount", Number of Circuits=1, Number of Terminals=2, Packaging="Cut Tape", Pins=2, Pricing="1=2,18, 10=1,796, 25=1,662, 50=1,5668, 100=1,4773 (USD)", Radiation Hardening=No, REACH SVHC=Yes, RMS Current (Irms)=3.22A, RoHS=Compliant, Schedule B="8504500000, 8504500000|8504500000|8504500000|8504500000|8504500000|8504500000|8504500000|8504500000|8504500000|8504500000|8504500000|8504500000|8504500000|8504500000|8504500000|8504500000|8504500000|8504500000|8504500000|8504500000|8504500000|8504500000|8504500000|85", Shielding=Yes, Stock=194, Supplier=DigiKey, Termination=SMD/SMT, Test Frequency=100kHz, Tolerance=20%, Weight=453.59237mg, Width=12.5mm
P1: library part POTENCJOMETR
R1 R2: library part RES_10_0805, "Rezystor: thick film; SMD; 0805; 10Ω; 250mW; ±5%; 150V; -55÷125°C"
R3: library part RES_4.3K_0805, "Res Thin Film 0805 4.3K Ohm 0.1% 0.125W ±25ppm/°C Molded SMD Punched Carrier T/R", Case Code (Imperial)=0805, Manufacturer=Panasonic, Manufacturer Lifecycle Status=ACTIVE, Manufacturer Part Number=ERA6AEB432V, Max Operating Temperature=155°C, Max Power Dissipation=125mW, Min Operating Temperature=-55°C, Supplier Part Number=1670236, Temperature Coefficient=25ppm/°C, Tolerance=0.1%, Voltage Rating=100V, Case/Package=0805, Category="Chip SMD Resistors", China RoHS=Non-Compliant, ComponentLink1Description=https://datasheet.octopart.com:443/ERA6AEB432V-Panasonic-datasheet-181959660.pdf?src-supplier=IHS, ComponentLink1URL=https://datasheet.octopart.com:443/ERA6AEB432V-Panasonic-datasheet-181959660.pdf?src-supplier=IHS, ComponentLink2Description=https://datasheet.octopart.com/ERA6AEB432V-Panasonic-datasheet-62287448.pdf, ComponentLink2URL=https://datasheet.octopart.com/ERA6AEB432V-Panasonic-datasheet-62287448.pdf, ComponentLink3Description=https://datasheet.octopart.com/ERA6AEB432V-Panasonic-datasheet-78375410.pdf, ComponentLink3URL=https://datasheet.octopart.com/ERA6AEB432V-Panasonic-datasheet-78375410.pdf, ComponentLink4Description=https://datasheet.octopart.com:443/ERA6AEB432V-Panasonic-datasheet-8367715.pdf?src-supplier=Newark, ComponentLink4URL=https://datasheet.octopart.com:443/ERA6AEB432V-Panasonic-datasheet-8367715.pdf?src-supplier=Newark, ComponentLink5Description=https://datasheet.octopart.com:443/ERA6AEB432V-Panasonic-datasheet-136531316.pdf?src-supplier=Newark, ComponentLink5URL=https://datasheet.octopart.com:443/ERA6AEB432V-Panasonic-datasheet-136531316.pdf?src-supplier=Newark, ComponentLink6Description=https://datasheet.octopart.com:443/ERA-6AEB432V-Panasonic-datasheet-118567.pdf?src-supplier=element14, ComponentLink6URL=https://datasheet.octopart.com:443/ERA-6AEB432V-Panasonic-datasheet-118567.pdf?src-supplier=element14, ComponentLink7Description=https://datasheet.octopart.com:443/ERA6AEB432V-Panasonic-datasheet-61114971.pdf?src-supplier=Future+Electronics, ComponentLink7URL=https://datasheet.octopart.com:443/ERA6AEB432V-Panasonic-datasheet-61114971.pdf?src-supplier=Future+Electronics, ComponentLink8Description=https://datasheet.octopart.com:443/ERA-6AEB432V-Panasonic-datasheet-12510007.pdf?src-supplier=Future+Electronics, ComponentLink8URL=https://datasheet.octopart.com:443/ERA-6AEB432V-Panasonic-datasheet-12510007.pdf?src-supplier=Future+Electronics, ComponentLink9Description=https://datasheet.octopart.com:443/ERA-6AEB432V-Panasonic-datasheet-11763931.pdf?src-supplier=Future+Electronics, ComponentLink9URL=https://datasheet.octopart.com:443/ERA-6AEB432V-Panasonic-datasheet-11763931.pdf?src-supplier=Future+Electronics, ComponentLink10Description=https://datasheet.octopart.com:443/ERA-6AEB432V-Panasonic-datasheet-5392808.pdf?src-supplier=Future+Electronics, ComponentLink10URL=https://datasheet.octopart.com:443/ERA-6AEB432V-Panasonic-datasheet-5392808.pdf?src-supplier=Future+Electronics, ComponentLink11Description=https://datasheet.octopart.com:443/ERA-6AEB432V-Panasonic-datasheet-154766165.pdf?src-supplier=Master+Electronics, ComponentLink11URL=https://datasheet.octopart.com:443/ERA-6AEB432V-Panasonic-datasheet-154766165.pdf?src-supplier=Master+Electronics, ComponentLink12Description=https://datasheet.octopart.com:443/ERA-6AEB432V-Panasonic-datasheet-10840895.pdf?src-supplier=Arrow+Electronics, ComponentLink12URL=https://datasheet.octopart.com:443/ERA-6AEB432V-Panasonic-datasheet-10840895.pdf?src-supplier=Arrow+Electronics, ComponentLink13Description=https://datasheet.octopart.com:443/ERA-6AEB432V-Panasonic-datasheet-13266200.pdf?src-supplier=Electro+Sonic, ComponentLink13URL=https://datasheet.octopart.com:443/ERA-6AEB432V-Panasonic-datasheet-13266200.pdf?src-supplier=Electro+Sonic, ComponentLink14Description=https://datasheet.octopart.com:443/ERA-6AEB432V-Panasonic-datasheet-33006989.pdf?src-supplier=Electro+Sonic, ComponentLink14URL=https://datasheet.octopart.com:443/ERA-6AEB432V-Panasonic-datasheet-33006989.pdf?src-supplier=Electro+Sonic, ComponentLink15Description=https://datasheet.octopart.com:443/ERA-6AEB432V-Panasonic-datasheet-46744048.pdf?src-supplier=Electro+Sonic, ComponentLink15URL=https://datasheet.octopart.com:443/ERA-6AEB432V-Panasonic-datasheet-46744048.pdf?src-supplier=Electro+Sonic, ComponentLink16Description=https://datasheet.octopart.com:443/ERA6AEB432V-Panasonic-datasheet-188913046.pdf?src-supplier=TME, ComponentLink16URL=https://datasheet.octopart.com:443/ERA6AEB432V-Panasonic-datasheet-188913046.pdf?src-supplier=TME, ComponentLink17Description=https://datasheet.octopart.com:443/ERA6AEB432V-Panasonic-datasheet-182736513.pdf?src-supplier=JRH+Electronics, ComponentLink17URL=https://datasheet.octopart.com:443/ERA6AEB432V-Panasonic-datasheet-182736513.pdf?src-supplier=JRH+Electronics, ComponentLink18Description=https://sigma.octopart.com:443/150570796/technical_drawing/Panasonic-ERA6AEB432V.pdf?src-supplier=Panasonic+SCT, ComponentLink18URL=https://sigma.octopart.com:443/150570796/technical_drawing/Panasonic-ERA6AEB432V.pdf?src-supplier=Panasonic+SCT, ComponentLink19Description=https://datasheet.octopart.com:443/ERA6AEB432V-Panasonic-datasheet-138783076.pdf?src-supplier=Burklin+Elektronik, ComponentLink19URL=https://datasheet.octopart.com:443/ERA6AEB432V-Panasonic-datasheet-138783076.pdf?src-supplier=Burklin+Elektronik, ComponentLink20Description=https://datasheet.octopart.com:443/ERA6AEB432V-Panasonic---ECG-datasheet-15994758.pdf?src-supplier=Farnell, ComponentLink20URL=https://datasheet.octopart.com:443/ERA6AEB432V-Panasonic---ECG-datasheet-15994758.pdf?src-supplier=Farnell, Composition="Thin Film", Contact Plating=Tin, Country of Origin=Japan, Depth=1.25mm, Export Control Classification Number (ECCN) Code=EAR99, Features="Automotive AEC-Q200", Harmonized Tariff Schedule (HTS) Code=8533.21.00.30, Height=500µm, Introduction Date=2006-05-29, Lead Free="Lead Free", Length=2mm, Lifecycle Status=Production, Military Standard=Not, Mounting Technology="Surface Mount", Number of Terminals=2, Number of Terminations=2, Packaging="Cut Tape", Part Series="Thin Film Chip Resistors, High Reliability Type", Pins=2, Power Dissipation=125mW, Power Rating=125mW, Radiation Hardening=No, REACH SVHC=Yes, RoHS=Compliant, Schedule B="8533210045, 8533210045|8533210045, 8533210045|8533210045|8533210045, 8533210045|8533210045|8533210045|8533210045", Stock=2679, Supplier=Farnell, Termination=SMD/SMT, Voltage Rating (DC)=100V, Weight=5.499807mg, Width=1.25mm, Working Voltage=100V
R4 R5 R7: library part RES_100K_0805, "Rezystor: thin film; precyzyjny; SMD; 0603; 50kΩ; 0,1W; ±0,1%; AR"
R6: library part RES_100K_0805, "RES_100K_0805"
R8: library part RES_51_0805
U5: "IC: wzmacniacz operacyjny; 10MHz; Ch: 2; 2,5÷5,5VDC; SO8; tuba"

## Free pads (board coordinates)
  round 1.524 hole 2 unplated: 3(77.724,91.186) 4(77.724,44.704) 5(138.176,44.704) 6(138.176,91.186)

## Via types
v1: diameter 0.6, hole 0.3, Top Layer to Bottom Layer, 147 vias
v2: diameter 0.7, hole 0.3, Top Layer to Bottom Layer, 2 vias

## Nets (pads, with @x,y where several pads share a name; then routed paths per layer and width w, separated by ;. In a path a pad name is that pad's centre, name@x,y a point inside that pad or via, vN(x,y) a via of type N, cw(c..) or ccw(c..) an arc to the next point about the centre after c; other vN are vias at no path point)
3V3: C8.2 C9.1 C11.2 U1.2 U1.4 U2.4 | length 27.9
  Top Layer w0.5: C8.2@95.896,71.932 95.984,71.844 U2.4
  Top Layer w1: 83.834,77.294 U1.2 83.82,78.472 83.82,77.294 84.406,76.708 92.203,76.708 94.234,74.677 94.234,74.527 C9.1 ; C9.1@94.314,74.297 95.896,72.715 C8.2@95.896,71.932
  Top Layer w1.5: 83.82,77.294 83.823,77.291 U1.4 84.373,72.39 85.04,71.723 85.04,69.823 C11.2
+5: C5.1 C6.1 C7.2 C10.2 C13.2 C14.2 J1.1 L1.1 U1.3 U4.2 U5.8 U6.1 | length 144.9
  Top Layer w0.6: C14.2 93.57,51.217 94.173,51.82 U6.1 ; U5.8 108.687,58.039 108.723,58.075 C13.2 ; U4.2 115.219,64.196 115.57,63.845 115.57,62.484
  Top Layer w0.9: C14.2@93.294,51.242 93.319,51.217 C14.2 C14.2@93.334,51.206
  Top Layer w1: C14.2@93.319,51.217 93.17,51.217 92.063,52.324 J1.1 90.888,50.256 90.888,49.66 92.355,48.192 117.471,48.192 120.524,51.245 120.524,53.3 115.57,58.254 ; C13.2 115.391,58.075 115.57,58.254 ; 115.57,62.484 115.57,58.254
  Top Layer w1.5: C7.2@87.818,84.709 C7.2 89.463,84.709 89.713,84.959 89.713,86.436
  Top Layer w2: U1.3@81.077,78.486 C10.2@81.077,81.33 ; U1.3 80.772,77.724 80.772,69.977 83.82,66.929 83.82,57.324 J1.1 ; C10.2 C10.2@81.077,81.33 ; C7.2@87.818,84.709 84.922,81.813 81.56,81.813 C10.2@81.077,81.33 ; C7.2 89.713,84.709 89.713,86.436 91.368,88.091 C6.1 C5.1 113.896,88.091 114.061,87.926 119.211,87.926 L1.1
ADC: R9.2 U2.10 | length 7.2
  Top Layer w0.5: U2.10 100.199,60.594 100.434,60.359 R9.2
D: D1.1 L1.2 U3.5 U3.6 U3.7 U3.8 | length 12.5
  Top Layer w1: U3.5 U3.8 ; U3.8@120.098,73.279 121.209,74.39 121.461,74.39 ; U3.8@120.111,73.343 122.382,73.343 D1.1
  Top Layer w2: L1.2 120.911,77.476 121.461,76.926 121.461,75.776 121.461,74.39
G: R1.2 U3.4
GND: C1.1 C2.2 C3.2 C4.2 C5.2 C6.2 C7.1 C8.1 C9.2 C10.1 C11.1 C12.1 C13.1 C14.1 C15.1 J1.2 J2.2 R7.1 R8.1 S1.1 U1.1 U2.5 U3.1 U3.2 U3.3 U4.4 U5.4 U6.3
  other v1: 85.852,46.355 89.177,46.376 117.96,46.497 114.61,46.527 110.213,46.624 126.596,46.624 106.863,46.654 123.246,46.654 96.116,46.751 103.101,46.751 92.766,46.781 99.751,46.781 129.667,46.99 132.992,47.011 80.391,47.752 83.716,47.773 89.177,48.916 85.827,48.946 132.992,49.551 129.642,49.581 106.197,49.733 113.482,49.739 102.847,49.763 110.132,49.769 80.391,50.165 83.716,50.313 102.847,52.303 106.172,52.324 129.794,52.451 133.119,52.472 113.62,52.761 109.855,52.832 111.506,54.229 82.748,54.946 80.264,54.991 133.119,55.012 129.769,55.042 88.9,55.245 92.225,55.266 113.65,56.111 135.778,56.665 124.079,57.404 127.404,57.425 118.11,57.531 121.435,57.552 92.225,57.806 88.875,57.836 93.929,58.903 96.52,58.928 88.773,59.69 92.098,59.711 110.515,59.766 107.165,59.796 127.404,59.965 124.054,59.995 135.808,60.015 121.435,60.092 118.085,60.122 105.562,62.179 102.212,62.209 92.098,62.251 93.959,62.253 96.499,62.253 88.748,62.281 110.49,62.357 125.349,62.738 128.674,62.759 108.331,62.865 119.761,62.992 123.086,63.013 93.548,64.11 96.139,64.135 102.212,64.749 105.537,64.77 128.674,65.299 125.324,65.329 123.086,65.553 119.736,65.583 93.705,66.444 96.118,67.46 86.797,67.609 125.222,67.691 128.547,67.712 90.784,69.746 109.22,70.104 112.545,70.125 128.547,70.252 125.197,70.282 100.457,70.358 103.782,70.379 135.524,71.778 91.821,71.882 88.288,71.994 89.916,72.136 112.545,72.665 109.195,72.695 103.782,72.919 100.432,72.949 88.9,74.676 135.554,75.128 109.22,75.565 112.545,75.586 97.409,76.327 112.545,78.126 135.27,78.128 109.195,78.156 98.552,78.232 101.877,78.253 92.583,78.359 95.908,78.38 101.877,80.793 98.527,80.823 89.939,80.92 95.908,80.92 86.589,80.95 92.558,80.95 123.653,80.955 109.347,81.026 115.951,81.026 112.672,81.047 119.276,81.047 135.3,81.478 108.966,83.058 112.268,83.185 119.276,83.587 115.926,83.617 92.202,83.82 97.028,83.82 102.743,83.82 95.527,83.841 106.068,83.841 123.683,84.305 135.27,85.24 101.473,85.344 97.028,85.725 103.251,86.106 125.73,86.36 106.068,86.381 129.055,86.381 92.177,86.411 83.464,87.071 80.114,87.101 135.3,88.59 129.055,88.921 125.705,88.951 80.015,89.141 83.439,89.154
  other v2: 134.815,46.727 136.085,46.727
IN_DRIVER: R2.2 U4.3 | length 2
  Top Layer w0.5: R2.2 112.158,63.229 114.156,63.229 U4.3
NetP1_1: P1.1 R3.1 | length 3.4
  Top Layer w0.5: P1.1 122.843,53.103 R3.1
NetP1_3: P1.3 R8.2 | length 3.4
  Top Layer w0.5: P1.3 121.8,49.486 122.974,49.486 123.831,50.344 124.131,50.344 124.231,50.444 R8.2
NRST: C12.2 S1.2 U2.6 | length 21
  Top Layer w0.5: S1.2@86.034,58.532 86.034,65.532 86.116,65.614 88.692,65.614 C12.2 90.079,65.695 94.628,70.244 U2.6
OUT: C1.2 C2.1 C3.1 C4.1 D1.2 J2.1 R3.2 | length 8.8
  Top Layer w0.5: R3.2 126.605,55.203 128.569,57.167 130.365,57.167 131.115,57.917 C1.2
OUT_DRIVER: R1.1 U4.5
REF3V3: C15.2 R6.1 U6.2 | length 4.5
  Top Layer w0.6: U6.2 96.073,51.392 95.898,51.217 C15.2 95.786,51.246 98.27,51.246 R6.1
SWCLK: J3.1 U2.25 | length 6.3
  Top Layer w0.5: J3.1 104.14,81.153 104.14,79.756 104.999,78.897 U2.25
SWDIO: J3.2 U2.24 | length 7.3
  Top Layer w0.5: U2.24 106.376,74.244 106.426,74.294 J3.2
TIM: R2.1 U2.16 | length 8.1
  Top Layer w0.5: U2.16 104.999,67.144 106.831,65.312 R2.1
U1: P1.2 R4.2 | length 3.4
  Top Layer w0.5: R4.2 117.517,53.374 P1.2
Vina+: R6.2 R7.2 U5.3 | length 6.2
  Top Layer w0.6: R6.2 R7.2 100.838,53.501 100.838,54.864 101.473,55.499 U5.3
Vina-: R4.1 R5.2 U5.2 | length 20.4
  Top Layer w0.6: R5.2 98.321,56.989 98.541,56.769 U5.2 103.287,56.769 108.782,51.274 R4.1
Vouta: R5.1 R9.1 U5.1 | length 5
  Top Layer w0.6: R5.1 99.407,59.089 99.568,58.928 99.765,58.928 100.434,58.259 R9.1 ; R9.1@100.734,58.259 100.954,58.039 U5.1
pads on no net: U2.1 U2.2 U2.3 U2.7 U2.8 U2.9 U2.11 U2.12 U2.13 U2.14 U2.15 U2.17 U2.18 U2.19 U2.20 U2.21 U2.22 U2.23 U2.26 U2.27 U2.28 U2.29 U2.30 U2.31 U2.32 U4.1 U5.5 U5.6 U5.7

## Polygon pours and split planes (outlines as drawn)
GND on Top Layer "GND_L01_P011" (solid, pour order 11): 78.74,90.17 78.74,45.72 137.16,45.72 137.16,90.17
GND on Top Layer "GND_L01_P010" (solid, pour order 10): 78.74,90.17 137.16,90.17 137.16,45.72 78.74,45.72
+5 on Top Layer "+5_L01_P008" (solid, pour order 8): 90.678,83.312 91.186,83.82 91.186,86.868 91.44,87.122 116.078,87.122 116.586,86.614 116.586,85.852 117.094,85.344 122.682,85.344 122.936,85.598 122.936,89.408 122.174,90.17 86.868,90.17 86.614,89.916 86.614,89.408 86.614,83.82 87.122,83.312
OUT on Top Layer "OUT_L01_P004" (solid, pour order 4): 125.476,81.788 125.73,82.042 133.096,82.042 133.35,81.788 133.35,56.642 133.096,56.388 129.794,56.388 129.54,56.642 129.54,71.628 129.286,71.882 125.73,71.882 125.476,72.136
OUT_DRIVER on Top Layer "OUT_DRIVER_L01_P003" (solid, pour order 3): 116.586,68.326 116.332,68.072 116.332,65.024 116.586,64.77 117.602,64.77 117.856,65.024 117.856,68.072 117.602,68.326
G on Top Layer "G_L01_P002" (solid, pour order 2): 114.046,69.85 113.792,69.596 113.792,66.802 114.046,66.548 115.316,66.548 115.57,66.802 115.57,69.596 115.316,69.85
D on Top Layer "D_L01_P001" (solid, pour order 1): 119.38,68.834 119.126,69.088 119.126,75.438 117.094,75.438 116.586,75.946 116.586,79.248 116.84,79.502 123.19,79.502 123.444,79.248 123.444,69.088 123.19,68.834
GND on Bottom Layer "GND_L02_P012" (solid, pour order 12): 78.74,90.17 78.74,45.72 137.16,45.72 137.16,90.17

## Silkscreen, mask and mechanical layers (free items; w line width, h text height)
Mechanical 1:
  lines w0.2: 76.2,44.45 ccw(c77.47,44.45) 77.47,43.18 138.43,43.18 ccw(c138.43,44.45) 139.7,44.45 139.7,46.99 139.7,91.44 ccw(c138.43,91.44) 138.43,92.71 77.47,92.71 ccw(c77.47,91.44) 76.2,91.44 76.2,44.45